# EAGLE board FeatherBoardTemplate (EAGLE 8.3.2)
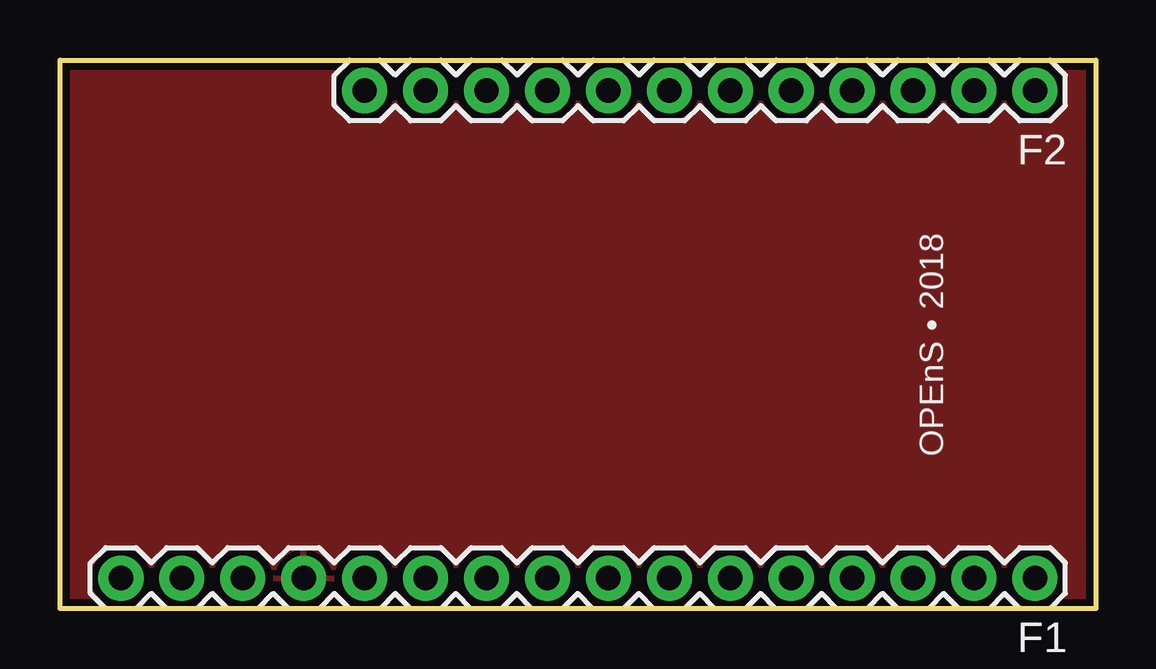
[diagram p0: board, top side]

Size 43.18 x 22.86 mm. Coordinates in mm from the lower left corner, seen from the top.
Outline: 0,0 0,22.86 43.18,22.86 43.18,0 0,0
Copper layers (1*16): Top 0.035mm / dielectric 1.5mm / Bottom 0.035mm
Design rules "SparkFun": minimum track width 8mil, minimum drill 20mil, track to track 8mil, track to pad 8mil, pad to pad 8mil, via to via 8mil, smd to smd 8mil, copper to edge 8mil, drill to drill 8mil, minimum pad ring 12mil, minimum via ring 10mil, stop-mask expansion 4mil, vias tented up to drill 20mil, thermal gap 10mil

## Footprints (pad centres in the part's own frame; a part is rotated, then mirrored left to right if it is on the bottom)
1X16 = drill 1.016 pad 1.88: 1 0,0; 2 2.54,0; 3 5.08,0; 4 7.62,0; 5 10.16,0; 6 12.7,0; 7 15.24,0; 8 17.78,0; 9 20.32,0; 10 22.86,0; 11 25.4,0; 12 27.94,0; 13 30.48,0; 14 33.02,0; 15 35.56,0; 16 38.1,0
1X12 = drill 1.016 pad 1.88: 1 0,0; 2 2.54,0; 3 5.08,0; 4 7.62,0; 5 10.16,0; 6 12.7,0; 7 15.24,0; 8 17.78,0; 9 20.32,0; 10 22.86,0; 11 25.4,0; 12 27.94,0

## Placement (x,y rotation side)
F1  [1X16]  40.64,1.27 180 top
F2  [1X12]  40.64,21.59 180 top

## Library data of the parts
F1 F2 = SparkFun-Connectors

## Nets
A0: F1.12
A1: F1.11
A2: F1.10
A3: F1.9
A4: F1.8
A5: F1.7
AREF: F1.14
BAT: F2.12
CE_P5: F2.3
D6: F2.4
D9: F2.5
D10: F2.6
D11: F2.7
D12: F2.8
D13: F2.9
EN: F2.11
GND: F1.13
MISO: F1.4
MOSI: F1.5
RST: F1.16
RX: F1.3
SCK: F1.6
SCL: F2.2
SDA: F2.1
SPEC: F1.1
TX: F1.2
USB: F2.10
VCC: F1.15

## Tracks (layer width: path | path; a pad name or v marks a point on that pad's centre or on a via)
GND
  pour Top (isolate 0.305): 0,0 0,22.86 43.18,22.86 43.18,0

## Text on the board
tPlace: OPEnS • 2018